# Altium PCB AFE_MCX_Adapter.PCBDOC
Units mm, origin at the board's own origin, x right, y up, seen from the top; angles counter-clockwise.
Board outline 59 x 20 mm, 2 copper layers (TOP, BOT), stack 1.57 mm thick; 8 components, 6 nets, 31 pads, 11 vias.
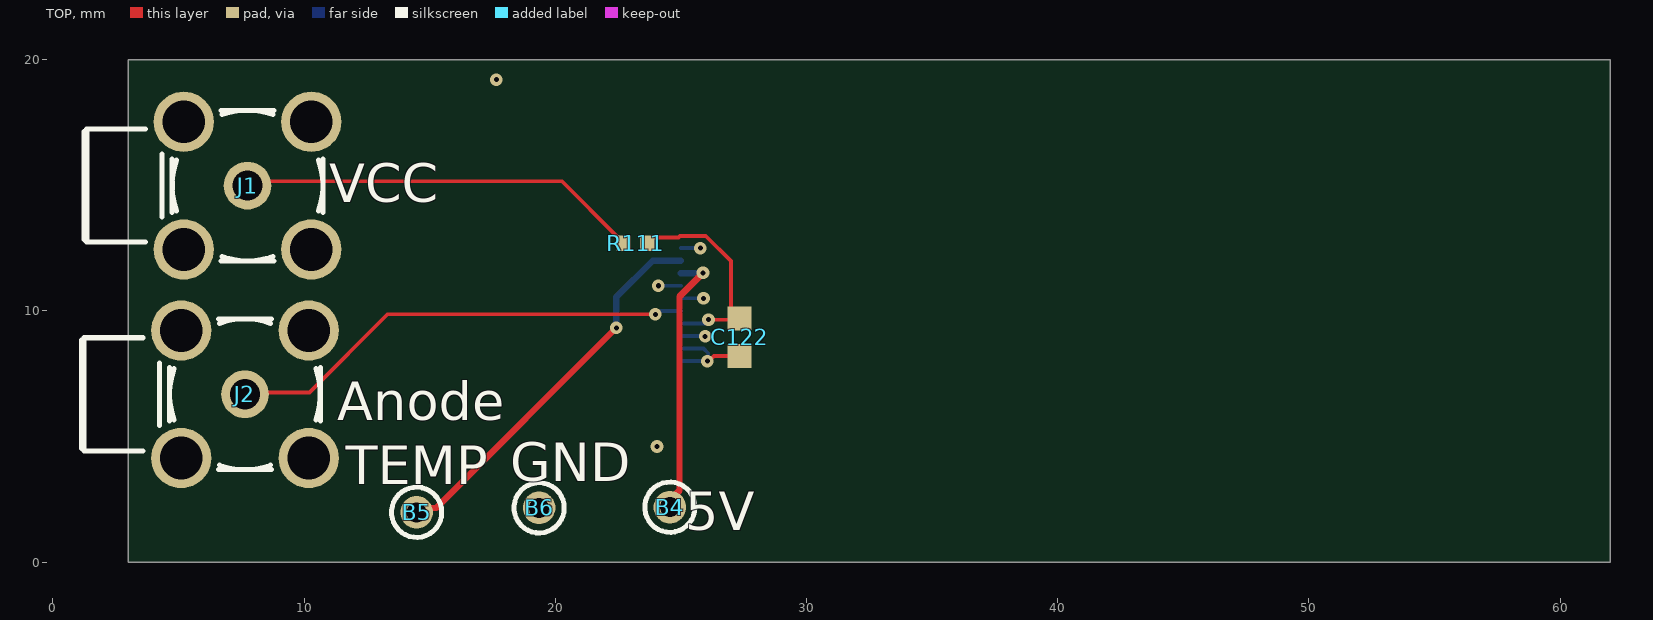
[diagram p0: TOP view]
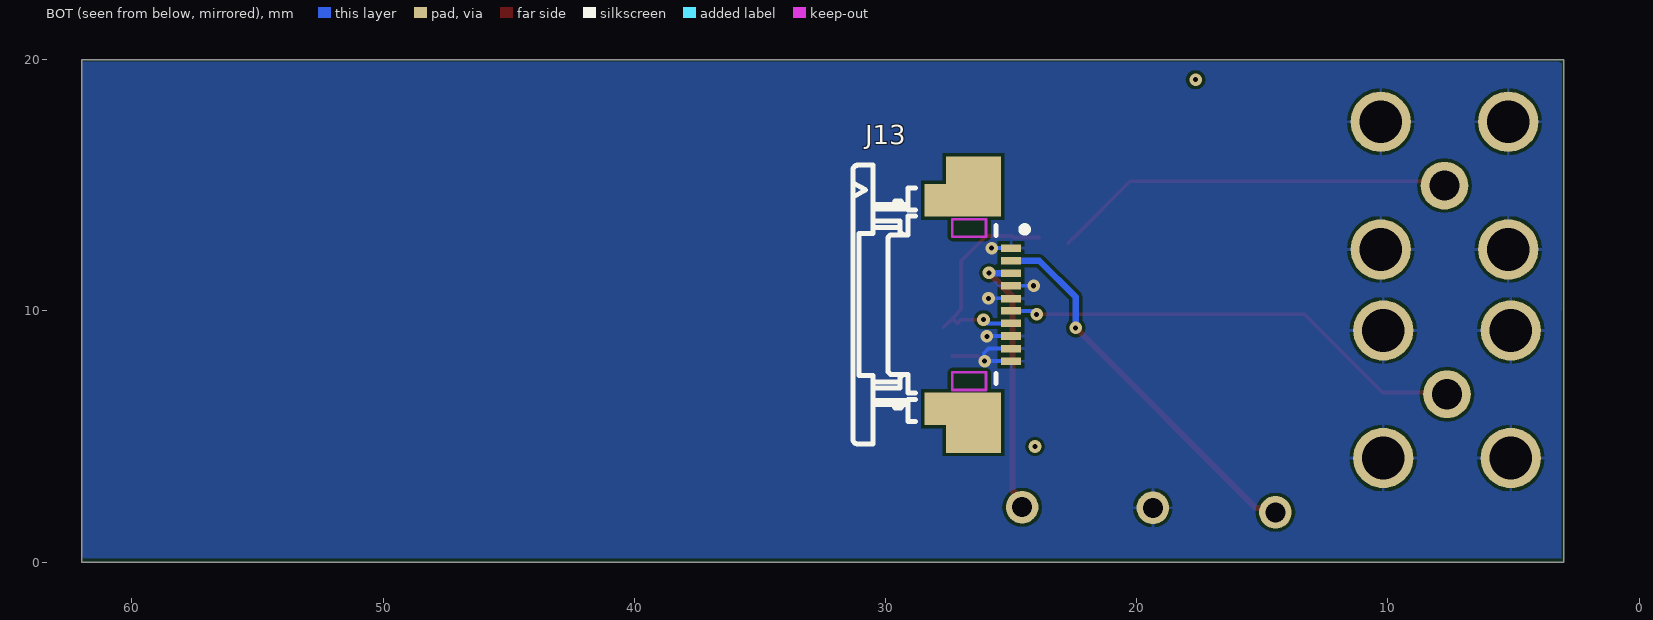
[diagram p1: BOT view, seen from below]
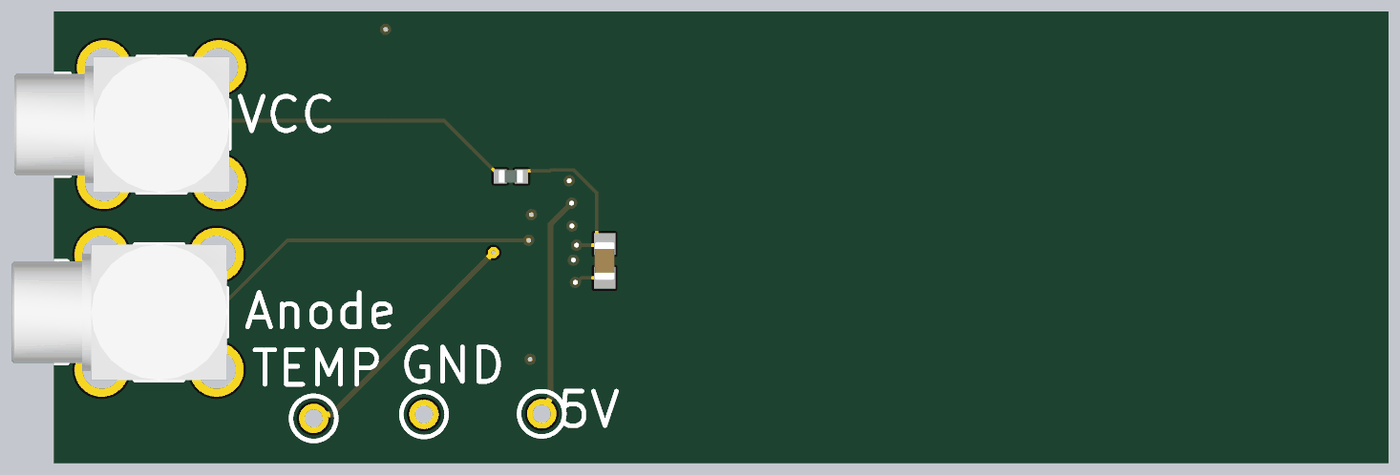
[diagram p2: 3D render of the assembled board from above, using the file's embedded part models]

## Layer stack, top to bottom
TopSolder: solder mask 0.01, Solder Resist, Dk 3.5
TOP: signal copper 0.035
Dielectric2: core 1.5, Core-042, Dk 4.6
BOT: signal copper 0.035
BottomSolder: solder mask 0.01, Solder Resist, Dk 3.5

## Board outline
3,0 62,0 62,20 3,20

## Design rules (kind name [scope] priority, off if disabled: settings)
AcuteAngle [All] p1: minimum=6.00000000000000E+0001 checktracksonly=FALSE
Clearance keepout [All vs OnLayer('KeepOutLayer')] p1: gap=0.1 ignorepadtopadclearanceinfootprint=FALSE
Clearance [All] p2: gap=0.127 ignorepadtopadclearanceinfootprint=FALSE
DiffPairsRouting [All] p1: maxlimit=0.508 minlimit=0.381 mostfreqgap=0.432 toplayer_minwidth=0.381 toplayer_maxwidth=0.381 toplayer_prefwidth=0.381 bottomlayer_minwidth=0.381 bottomlayer_maxwidth=0.381 bottomlayer_prefwidth=0.381 maxuncoupledlength=12.7
HoleSize [All] p1: absolutevalues=TRUE maxlimit=5.08 minlimit=0.025 maxpercent=80.000 minpercent=20.000
HoleToHoleClearance [All] p1: gap=0.127 allowstackedmicrovias=TRUE
MinimumSolderMaskSliver [All] p1: minsoldermaskwidth=0
MinimumSolderMaskSliver SilkscreenOverComponentPads [All] p2: minsoldermaskwidth=0
PlaneClearance [All] p1: clearance=0.203
PlaneConnect [All] p1: pad.planeconnectstyle=Relief pad.reliefexpansion=0.127 pad.reliefentries=4 pad.reliefconductorwidth=0.127 pad.reliefairgap=0.127 via.planeconnectstyle=Direct via.reliefexpansion=0.508 via.reliefentries=4 via.reliefconductorwidth=0.254 via.reliefairgap=0.254
PolygonConnect [All] p1: thpad.connectstyle=Relief thpad.reliefconductorwidth=0.127 thpad.reliefentries=4 thpad.polygonreliefangle="90 Angle" thpad.airgapwidth=0.127 smdpad.connectstyle=Relief smdpad.reliefconductorwidth=0.127 smdpad.reliefentries=4 smdpad.polygonreliefangle="90 Angle" smdpad.airgapwidth=0.127 via.connectstyle=Direct via.reliefconductorwidth=0.254 via.reliefentries=4 via.polygonreliefangle="90 Angle" via.airgapwidth=0.254
RoomDefinition AFE_MCX_Adapter [InComponentClass('AFE_MCX_Adapter')] p1 off: confinementstyle=ConfineIn formatcopy=TRUE lockcomponents=FALSE outline 59.931,20 59.931,4.796 54,4.796 54,20
RoutingVias [All] p1: holewidth=0.2 width=0.5 viastyle="Through Hole" minholewidth=0.2 minwidth=0.5 maxholewidth=0.5 maxwidth=1
SilkToSilkClearance [All] p1: silktosilkclearance=0
SilkToSolderMaskClearance [IsPad] p1: minsilkscreentomaskgap=0 clearancetoexposedcopper=TRUE
SolderMaskExpansion [All] p1: expansion=0.102
ViasUnderSMD ViasUnderSMD_allow [InComponent('IC18') or InComponent('IC10') or InComponent('IC13') or InComponent('IC14') or InComponent('IC15')] p1: allowed=TRUE
ViasUnderSMD [All] p2: allowed=FALSE
Width Width_1 [(InDifferentialPairClass('All Differential Pairs'))] p1: maxlimit=0.203 minlimit=0.203 preferedwidth=0.203
Width [All] p2: maxlimit=2.54 minlimit=0.152 preferedwidth=0.152
22 further rules are at their usual default settings.

## Classes and differential pairs
component class AFE_MCX_Adapter: B5 B6 C122 J1 J2 J13 R111

## Components (designator, comment, footprint, x,y, rotation, side; value= is the part's Value field where it differs from the comment)
B4 "Plated Hole" c130h80 24.562,2.184 r180 top
B5 "Plated Hole" c130h80 14.478,1.981 r90 top
B6 "Plated Hole" c130h80 19.355,2.159 r90 top
C122 "100nF" CAPC1608X90N 27.34,8.95 r90 top
J1 "MCX" AMPHENOL_919-383J-51A 7.747,14.986 r180 top
J2 "MCX" AMPHENOL_919-383J-51A 7.645,6.68 r180 top
J13 "FFC/FPC" MOLEX_52745-1097 25,10.25 r270 bottom
R111 "10k" RESC1005X40N 23.195,12.694 r180 top

## Footprints (in the part's own frame and the unit in brackets; to place one, negate y for a bottom-side part, rotate by r counter-clockwise, add the part's x,y. Pads: shape width x height; smd on the part's side, far side on the other; paste and mask are expansions set on the pad)
AMPHENOL_919-383J-51A [mm] "50 Ohm, RF Connector, MCX Right Angle PCB Receptacle Jack"
  round 1.9 hole 1.2: 1(0,0)
  round 2.4 hole 1.7: 2(-2.54,2.54) 2(-2.54,-2.54) 2(2.54,2.54) 2(2.54,-2.54)
  silkscreen extent -3,-3 6.5,3, body extent -3,-3 6.5,3, height 6
c130h80 [mm] "Plated Through Hole: Hole Dia.=0.8mm Pad Dia.=1.30mm, , IPC-7251 Level C"
  round 1.3 hole 0.8: 1(0,0)
  silkscreen extent -1,-1 1,1
CAPC1608X90N [mm] "Chip Capacitor, Body 1.6x0.8mm IPC Medium Density"
  rect 0.95x0.95 smd: 1(-0.75,0) 2(0.75,0)
  body extent -0.85,-0.45 0.85,0.45, height 0.9
MOLEX_52745-1097 [mm] "10 Contacts, 0.5mm Pitch, Right Angled Surface Mount FPC Connector, ZIF, Top Contact Style"
  rect 0.3x0.8 smd: 1(-2.25,0) 2(-1.75,0) 3(-1.25,0) 4(-0.75,0) 5(-0.24,0) 6(0.25,0) 7(0.75,0) 8(1.25,0) 9(1.75,0) 10(2.25,0)
  rect 1.1x2.2 smd: MECH(-5.35,-1.5) MECH(5.35,-1.5)
  rect 1.3x3.05 smd: MECH(-4.15,-1.925) MECH(4.15,-1.925)
  TOP keep-out lines w0.1: 3.4,-1 3.4,-2.34 2.7,-2.34 2.7,-1 3.4,-1 ; -2.7,-1 -3.4,-1 -3.4,-2.34 -2.7,-2.34 -2.7,-1
  silkscreen extent -5.55,-6.3 5.55,0.66, body extent -5.55,-6.3 5.55,0.1, height 2
RESC1005X40N [mm] "Chip Resistor, EIA 0402, Metric 1005, Body 1.0x0.5mm, IPC Medium Density"
  rect 0.58x0.62 smd: 1(-0.47,0) 2(0.47,0)
  body extent -0.52,-0.27 0.53,0.28, height 0.4

## Part data
B4 B5 B6: library part PLATED_HOLE0.8_PAD1.3, "Single Terminal Socket", Author="CERN DEM JLC", ComponentHeight=0mm, Component Type="Standard (No BOM)", CreateDate=30.10.2008, Family="Plated Hole", HelpURL=Undefined, LatestRevisionDate=30.10.2008, Mounted=No, PackageDescription="Plated Through Hole: Hole Dia.=0.8mm Pad Dia.=1.3mm, IPC-7251 Level C", Part Description="Plated Through Hole: Hole Dia.=0.8mm Pad Dia.=1.3mm, IPC-7251 Level C", Part Number=PLATED_HOLE0.8_PAD1.3, Pin Count=1, Sense=No, SMD=No, Socket=No, Status=None
C122: library part CC0603_100NF_100V_10%_X7R, "Non-polarised capacitor", Case=0603, Manufacturer=GENERIC, Manufacturer1 ComponentHeight=0.9mm, Manufacturer1 Example=MURATA, Manufacturer1 Part Number=GRM188R72A104KA35D, Tolerance=±10%, Voltage=100V, Author="CERN DEM JLC", Component Type=Standard, CreateDate=11.12.2013, HelpURL=\\cern.ch\dfs\Applications\Altium\Datasheets\CC0603_MURATA_GRM188R72A104KA35D.pdf, LatestRevisionDate=11.12.2013, Manufacturer Part Number=CC0603_100NF_100V_10%_X7R, Mounted=Yes, Part Description="SMD Multilayer Chip Ceramic Capacitor", Part Number=CC0603_100NF_100V_10%_X7R, Pin Count=2, Sense=No, SMD=Yes, Socket=No, Status=None, TC=X7R
J1 J2: library part AMPHENOL_919-383J-51A, Manufacturer=AMPHENOL, Manufacturer Part Number=919-383J-51A, Author="CERN DEM BC", ComponentHeight=6mm, Component Type=Standard, CreateDate=31.01.2019, Family=MCX, HelpURL=\\cern.ch\dfs\Applications\Altium\Datasheets\AMPHENOL_919-383J-51A.pdf, LatestRevisionDate=31.01.2019, Mounted=Yes, Part Description="50 Ohm, RF Connector, MCX Right Angle PCB Receptacle Jack", Part Number=AMPHENOL_919-383J-51A, Pin Count=5, PressFit=No, Sense=No, SMD=No, Socket=No, Status=None
J13: library part MOLEX_52745-1097, "Connector 10 Female", Manufacturer=MOLEX, Manufacturer Part Number=52745-1097, Author="CERN DEM JLC", ComponentHeight=2mm, Component Type=Standard, CreateDate=04.11.2014, Family=FFC/FPC, HelpURL=\\cern.ch\dfs\Applications\Altium\Datasheets\MOLEX_52745-1097.pdf, LatestRevisionDate=05.12.2014, Mounted=Yes, Part Description="10 Contacts, 0.5mm Pitch, Right Angled Surface Mount FFC/FPC Connector, ZIF, Top Contact Style", Part Number=MOLEX_52745-1097, Pin Count=10, PressFit=No, Sense=No, SMD=Yes, Socket=No, Status=None
R111: library part R0402_10K_1%_0.0625W_100PPM, "Resistor - 1%", Case=0402, Manufacturer=GENERIC, Manufacturer1 ComponentHeight=0.4mm, Manufacturer1 Example="YAGEO PHYCOMP", Manufacturer1 Part Number=232270671003L, Power=0.0625W, Tolerance=±1%, Author="CERN DEM JLC", Component Type=Standard, CreateDate=03.12.2007, HelpURL=\\cern.ch\dfs\Applications\Altium\Datasheets\R0402_Phycomp_RC0402.pdf, LatestRevisionDate=17.10.2012, Manufacturer Part Number=R0402_10K_1%_0.0625W_100PPM, Mounted=Yes, Part Description="General Purpose Thick Film Chip Resistor", Part Number=R0402_10K_1%_0.0625W_100PPM, Pin Count=2, PressFit=No, Sense=No, SMD=Yes, Socket=No, Status="Not Recommended", TC=±100ppm/°C

## Via types
v1: diameter 0.5, hole 0.2, TOP to BOT, tented both sides, 10 vias
v2: diameter 0.5, hole 0.2, TOP to BOT, 1 vias

## Nets (pads, with @x,y where several pads share a name; then routed paths per layer and width w, separated by ;. In a path a pad name is that pad's centre, name@x,y a point inside that pad or via, vN(x,y) a via of type N, cw(c..) or ccw(c..) an arc to the next point about the centre after c; other vN are vias at no path point)
GND: B6.1 C122.1 J1.2 J2.2 J13.1 J13.4 J13.5 J13.8 J13.9 J13.10 | length 7.5
  TOP w0.152: v1(26.052,8.002) 26.118,8.002 26.315,8.2 C122.1
  BOT w0.152: v1(24.105,11) J13.4 ; J13.10 25.002,8.002 v1(26.052,8.002) 26.087,8.037 26.087,8.313 25.9,8.5 J13.9 ; J13.8 25.006,8.994 25.956,8.994 v1(25.963,8.988) ; J13.5 25.01,10.5 v1(25.9,10.5) ; J13.1 v1(25.778,12.5)
P5V0: B4.1 J13.3 | length 10.7
  TOP w0.254: B4.1@24.689,2.159 24.689,2.594 24.943,2.848 24.943,10.571 v1(25.882,11.51)
  BOT w0.254: J13.3 25.872,11.5 v1(25.882,11.51)
SIPM_E_A: J2.1 J13.6 | length 18.3
  TOP w0.152: J2.1@8.001,6.756 10.211,6.756 13.319,9.865 v1(23.985,9.865)
  BOT w0.152: v1(23.985,9.865) 24.12,10 J13.6
SIPM_E_C: C122.2 J13.7 R111.1 | length 9
  TOP w0.152: R111.1@23.879,12.927 24.902,12.927 24.953,12.979 25.993,12.979 26.991,11.98 26.991,10.049 C122.2 ; v1(26.1,9.65) 26.991,9.65 27.141,9.501 C122.2 ; C122.2@27.694,9.346 C122.2
  BOT w0.152: J13.7 25.95,9.5 v1(26.1,9.65)
SIPM_VCC_EXT: J1.1 R111.2 | length 15.9
  TOP w0.152: J1.1@7.874,15.164 20.255,15.164 22.491,12.927 22.511,12.927 22.725,12.714 R111.2
TEMP_EXT: B5.1 J13.2 | length 15.4
  TOP w0.254: B5.1@14.453,2.057 14.547,2.151 15.258,2.151 v2(22.428,9.322)
  BOT w0.254: v2(22.428,9.322) 22.428,10.552 23.876,12 J13.2
pads on no net: J13.MECH
copper on no net:
  other v1: 24.05,4.6 17.655,19.202

## Polygon pours and split planes (outlines as drawn)
GND on BOT "NONET_L-01_P-001" (solid, remove dead copper, pour order 0): 3.073,20.015 3.175,19.914 62.001,19.914 62.001,0.229 61.925,0.152 3.099,0.152

## Silkscreen, mask and mechanical layers (free items; w line width, h text height)
TopOverlay:
  text "VCC" at 10.998,14.326 h1.52
  text "Anode" at 11.328,5.639 h1.52
  text "GND" at 18.212,3.226 h1.52
  text "TEMP" at 11.659,3.099 h1.52
  text "5V" at 25.171,1.27 h1.52
Mechanical1:
  the board outline again, w0.254